# Altium PCB blueboard_h_bridges.PcbDoc
Units mm, origin at the board's own origin, x right, y up, seen from the top; angles counter-clockwise.
Board outline 35 x 18.4 mm, 2 copper layers (Top Layer, Bottom Layer); 28 components, 13 nets, 49 pads, 92 vias.
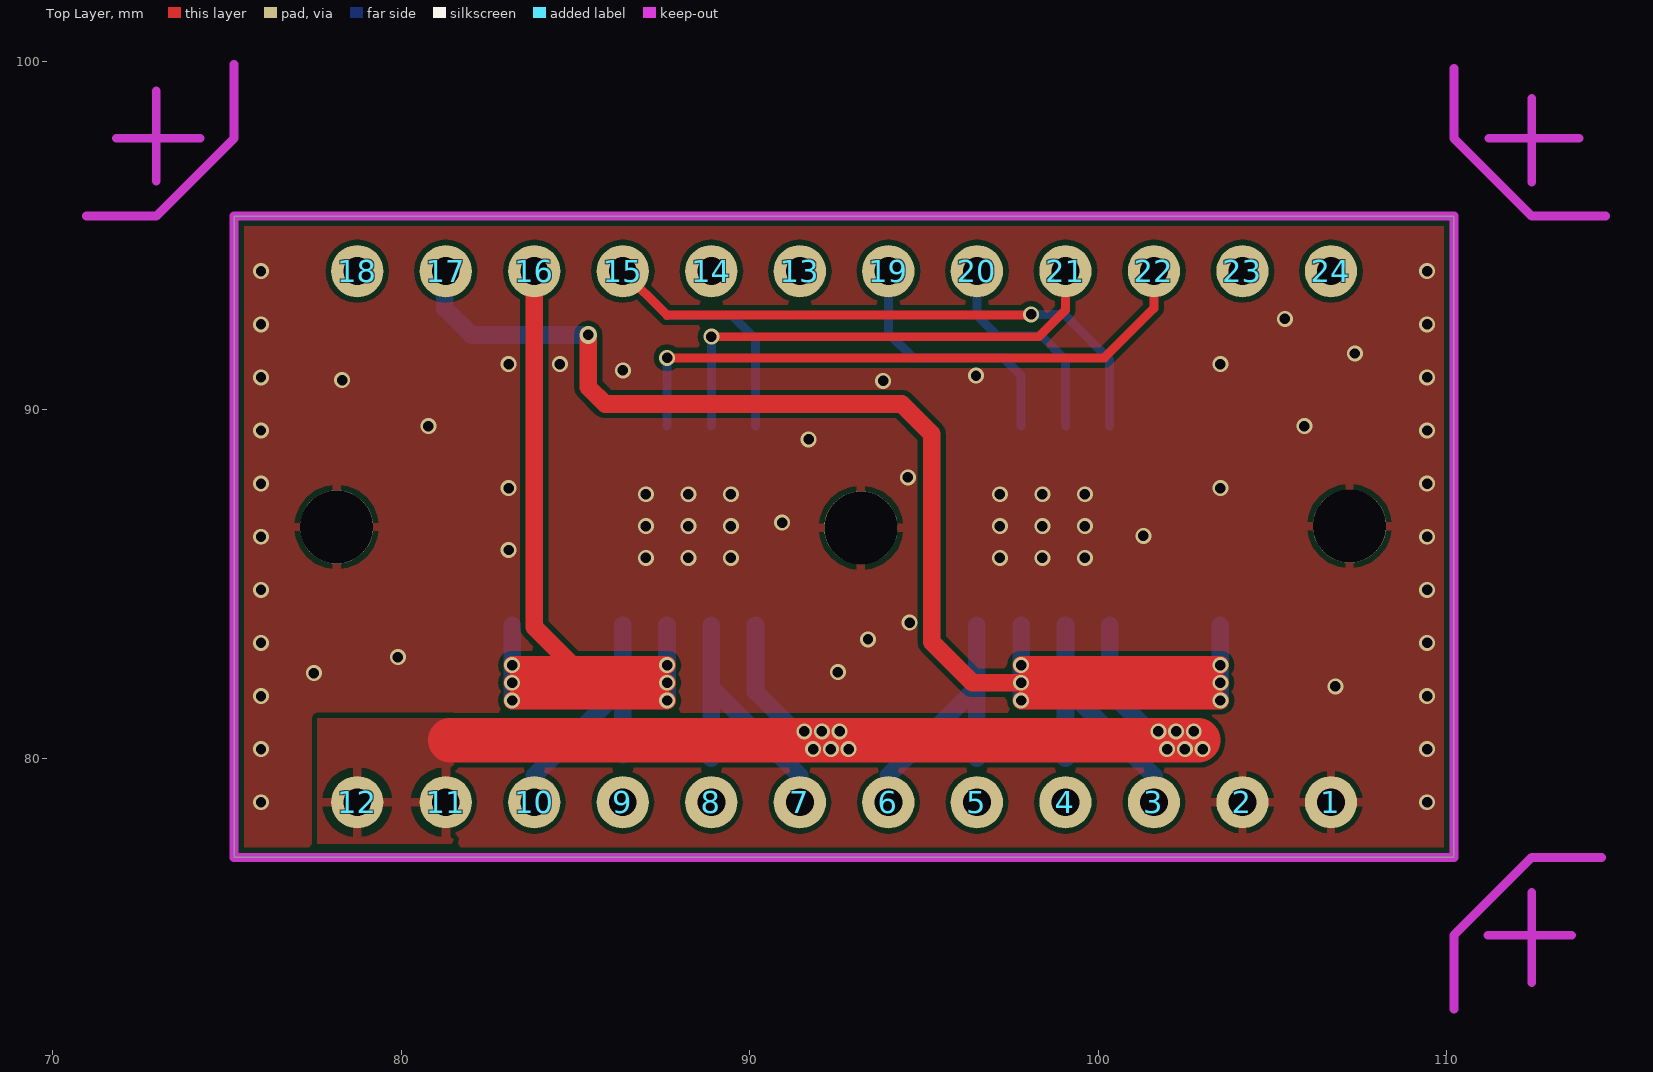
[diagram p0: Top Layer view]
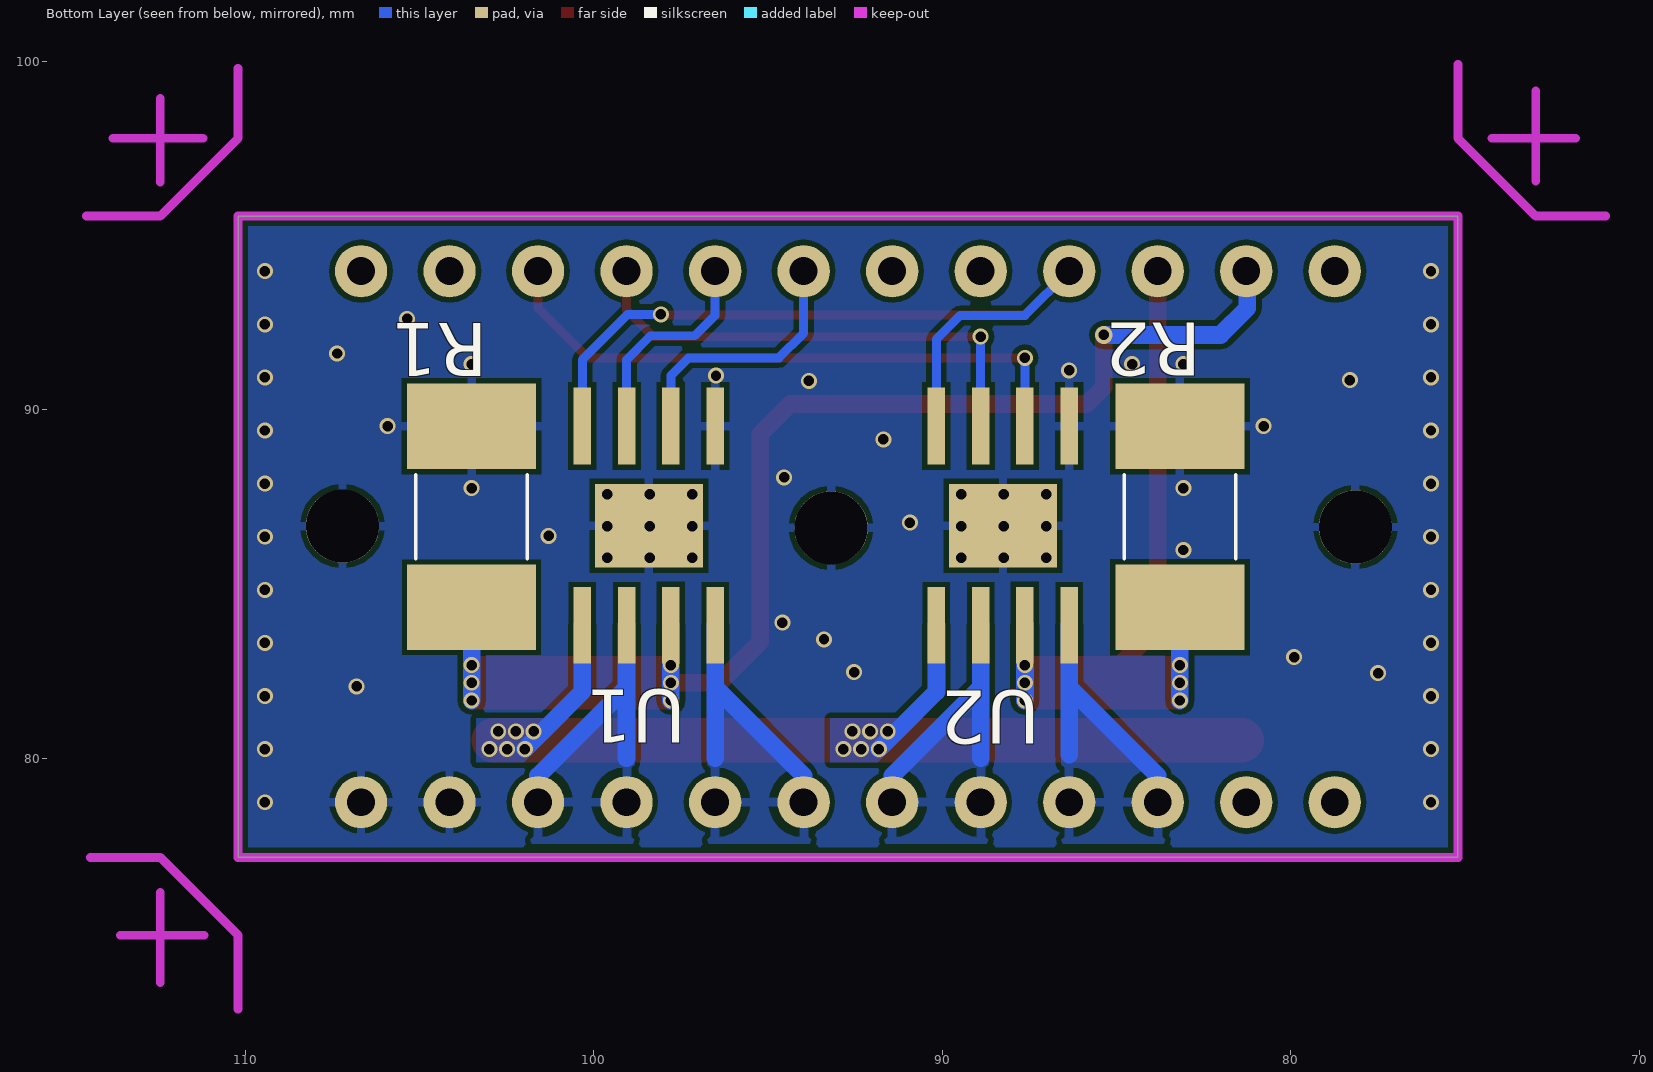
[diagram p1: Bottom Layer view, seen from below]
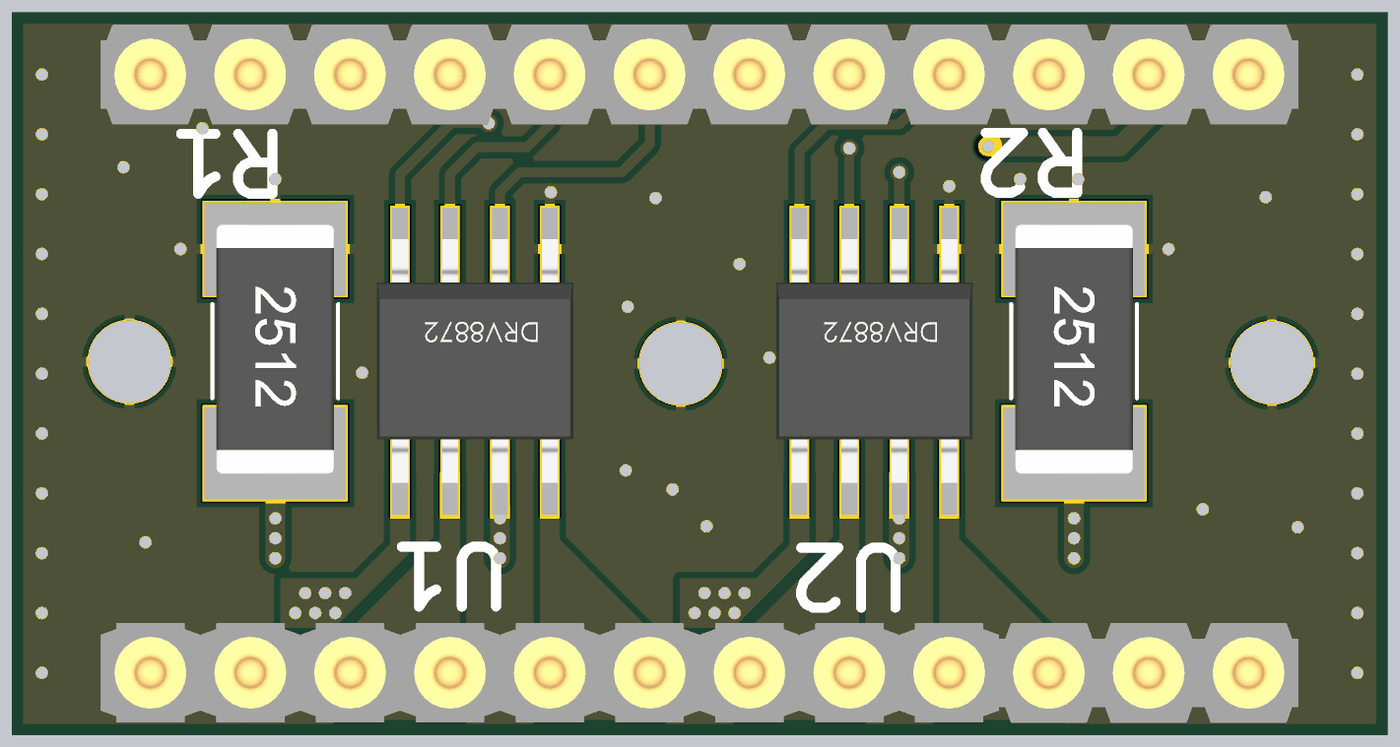
[diagram p2: 3D render of the assembled board from below, using the file's embedded part models]

## Layer stack, top to bottom
Top Layer: signal copper 0.0356
Dielectric: dielectric 0.32, FR-4, Dk 4.8
Bottom Layer: signal copper 0.0356

## Board outline
75.206,77.158 110.206,77.158 110.206,95.558 75.206,95.558

## Design rules (kind name [scope] priority, off if disabled: settings)
Clearance [All] p1: gap=0.152
PlaneConnect PlaneConnect_1 [IsVia] p1: planeconnectstyle=Direct reliefexpansion=0.508 reliefentries=4 reliefconductorwidth=0.254 reliefairgap=0.254
PlaneConnect [All] p2: planeconnectstyle=Relief reliefexpansion=0.508 reliefentries=4 reliefconductorwidth=0.254 reliefairgap=0.254
PolygonConnect PolygonConnect_1 [IsVia vs InNet('GND') Or InNet('VM')] p1: connectstyle=Direct reliefconductorwidth=0.254 reliefentries=4 polygonreliefangle="90 Angle"
PolygonConnect [All] p2: connectstyle=Relief reliefconductorwidth=0.254 reliefentries=4 polygonreliefangle="90 Angle"
RoutingVias [All] p1: holewidth=0.711 width=1.27 viastyle="Through Hole" minholewidth=0.711 minwidth=1.27 maxholewidth=0.711 maxwidth=1.27
SilkscreenOverComponentPads [All] p1: minsilkscreentomaskgap=0.254
SolderMaskExpansion [All] p1: expansion=0.102
Width [All] p1: maxlimit=1.524 minlimit=0.254 preferedwidth=0.254
26 further rules are at their usual default settings.

## Components (designator, comment, footprint, x,y, rotation, side; value= is the part's Value field where it differs from the comment)
1 "Pad" PAD#1 106.68,78.74 r90 top
2 "Pad" PAD#2 104.14,78.74 r90 top
3 "Pad" PAD#3 101.6,78.74 r90 top
4 "Pad" PAD#4 99.06,78.74 r90 top
5 "Pad" PAD#5 96.52,78.74 r90 top
6 "Pad" PAD#6 93.98,78.74 r90 top
7 "Pad" PAD#7 91.44,78.74 r90 top
8 "Pad" PAD#8 88.9,78.74 r90 top
9 "Pad" PAD#9 86.36,78.74 r90 top
10 "Pad" PAD#10 83.82,78.74 r0 top
11 "Pad" PAD#11 81.28,78.74 r0 top
12 "Pad" PAD#12 78.74,78.74 r0 top
13 "Pad" PAD#13 91.44,93.98 r0 top
14 "Pad" PAD#14 88.9,93.98 r0 top
15 "Pad" PAD#15 86.36,93.98 r0 top
16 "Pad" PAD#16 83.82,93.98 r0 top
17 "Pad" PAD#17 81.28,93.98 r0 top
18 "Pad" PAD#18 78.74,93.98 r0 top
19 "Pad" PAD#19 93.98,93.98 r0 top
20 "Pad" PAD#20 96.52,93.98 r0 top
21 "Pad" PAD#21 99.06,93.98 r0 top
22 "Pad" PAD#22 101.6,93.98 r0 top
23 "Pad" PAD#23 104.14,93.98 r0 top
24 "Pad" PAD#24 106.68,93.98 r0 top
R1 "Res2" 2512 103.505,89.535 r270 bottom
R2 "Res2" 2512 83.185,89.535 r270 bottom
U1 "DRV8872" DDA 96.52,89.535 r270 bottom
U2 "DRV8872" DDA 86.36,89.535 r270 bottom

## Footprints (in the part's own frame and the unit in brackets; to place one, negate y for a bottom-side part, rotate by r counter-clockwise, add the part's x,y. Pads: shape width x height; smd on the part's side, far side on the other; paste and mask are expansions set on the pad)
2512 [mm]
  rect 2.45x3.7 smd paste-0.05 mask+0.05: 1(0,0) 2(5.2,0)
  silkscreen extent 1.4,-1.6 3.8,1.6, body extent -0.62,-1.5 5.73,1.5, height 1.6
DDA [mm] "PowerPAD PLASTIC SMALL-OUTLINE"
  rect 2.2x0.5 smd paste-0.05 mask+0.05: 1(0,0) 2(0,-1.27) 3(0,-2.54) 4(0,-3.81) 5(5.715,-3.81) 6(5.715,-2.54) 7(5.715,-1.27) 8(5.715,0)
  rect 2.4x3.1 smd paste-0.05 mask+0.275: PPAD(2.86,-1.9)
  body extent -0.24,-4.4 5.96,0.6, height 1.53
PAD#1 [mm]
  round 1.5 hole 0.8 paste-0.05 mask+0.05: 1(0,0)
  body extent -1.27,-1.27 1.27,1.27, height 3.07
PAD#2 [mm]
  round 1.5 hole 0.8 paste-0.05 mask+0.05: 2(0,0)
  body extent -1.27,-1.27 1.27,1.27, height 3.07
PAD#3 [mm]
  round 1.5 hole 0.8 paste-0.05 mask+0.05: 3(0,0)
  body extent -1.27,-1.27 1.27,1.27, height 3.07
PAD#4 [mm]
  round 1.5 hole 0.8 paste-0.05 mask+0.05: 4(0,0)
  body extent -1.27,-1.27 1.27,1.27, height 3.07
PAD#5 [mm]
  round 1.5 hole 0.8 paste-0.05 mask+0.05: 5(0,0)
  body extent -1.27,-1.27 1.27,1.27, height 3.07
PAD#6 [mm]
  round 1.5 hole 0.8 paste-0.05 mask+0.05: 6(0,0)
  body extent -1.27,-1.27 1.27,1.27, height 3.07
PAD#7 [mm]
  round 1.5 hole 0.8 paste-0.05 mask+0.05: 7(0,0)
  body extent -1.27,-1.27 1.27,1.27, height 3.07
PAD#8 [mm]
  round 1.5 hole 0.8 paste-0.05 mask+0.05: 8(0,0)
  body extent -1.27,-1.27 1.27,1.27, height 3.07
PAD#9 [mm]
  round 1.5 hole 0.8 paste-0.05 mask+0.05: 9(0,0)
  body extent -1.27,-1.27 1.27,1.27, height 3.07
PAD#10 [mm]
  round 1.5 hole 0.8 paste-0.05 mask+0.05: 10(0,0)
  body extent -1.27,-1.27 1.27,1.27, height 3.07
PAD#11 [mm]
  round 1.5 hole 0.8 paste-0.05 mask+0.05: 11(0,0)
  body extent -1.27,-1.27 1.27,1.27, height 3.07
PAD#12 [mm]
  round 1.5 hole 0.8 paste-0.05 mask+0.05: 12(0,0)
  body extent -1.27,-1.27 1.27,1.27, height 3.07
PAD#13 [mm]
  round 1.5 hole 0.8 paste-0.05 mask+0.05: 13(0,0)
  body extent -1.27,-1.27 1.27,1.27, height 3.07
PAD#14 [mm]
  round 1.5 hole 0.8 paste-0.05 mask+0.05: 14(0,0)
  body extent -1.27,-1.27 1.27,1.27, height 3.07
PAD#15 [mm]
  round 1.5 hole 0.8 paste-0.05 mask+0.05: 15(0,0)
  body extent -1.27,-1.27 1.27,1.27, height 3.07
PAD#16 [mm]
  round 1.5 hole 0.8 paste-0.05 mask+0.05: 16(0,0)
  body extent -1.27,-1.27 1.27,1.27, height 3.07
PAD#17 [mm]
  round 1.5 hole 0.8 paste-0.05 mask+0.05: 17(0,0)
  body extent -1.27,-1.27 1.27,1.27, height 3.07
PAD#18 [mm]
  round 1.5 hole 0.8 paste-0.05 mask+0.05: 18(0,0)
  body extent -1.27,-1.27 1.27,1.27, height 3.07
PAD#19 [mm]
  round 1.5 hole 0.8 paste-0.05 mask+0.05: 19(0,0)
  body extent -1.27,-1.27 1.27,1.27, height 3.07
PAD#20 [mm]
  round 1.5 hole 0.8 paste-0.05 mask+0.05: 20(0,0)
  body extent -1.27,-1.27 1.27,1.27, height 3.07
PAD#21 [mm]
  round 1.5 hole 0.8 paste-0.05 mask+0.05: 21(0,0)
  body extent -1.27,-1.27 1.27,1.27, height 3.07
PAD#22 [mm]
  round 1.5 hole 0.8 paste-0.05 mask+0.05: 22(0,0)
  body extent -1.27,-1.27 1.27,1.27, height 3.07
PAD#23 [mm]
  round 1.5 hole 0.8 paste-0.05 mask+0.05: 23(0,0)
  body extent -1.27,-1.27 1.27,1.27, height 3.07
PAD#24 [mm]
  round 1.5 hole 0.8 paste-0.05 mask+0.05: 24(0,0)
  body extent -1.27,-1.27 1.27,1.27, height 3.07

## Part data
R1 R2: "Resistor"
U1 U2: "3.6A Brushed  DC Motor  Driver  With Fault Reporting"

## Free pads (board coordinates)
  round 2.1 hole 2.1 paste-0.05 mask+0.05: 0(78.148,86.639) 0(93.193,86.614) 0(107.213,86.665)

## Via types
v1: diameter 0.457, hole 0.3, Top Layer to Bottom Layer, tented both sides, 91 vias
v2: diameter 0.508, hole 0.305, Top Layer to Bottom Layer, 1 vias

## Nets (pads, with @x,y where several pads share a name; then routed paths per layer and width w, separated by ;. In a path a pad name is that pad's centre, name@x,y a point inside that pad or via, vN(x,y) a via of type N, cw(c..) or ccw(c..) an arc to the next point about the centre after c; other vN are vias at no path point)
AIN_1: 20.20 U1.3 | length 6.2
  Bottom Layer w0.254: 20.20 96.52,92.71 97.104,92.126 98.374,92.126 99.06,91.44 U1.3
AIN_2: 19.19 U1.2 | length 7.6
  Bottom Layer w0.254: 19.19 93.98,92.202 94.691,91.491 97.282,91.491 97.79,90.983 U1.2
  Bottom Layer w0.508: 19.19@93.955,93.955 19.19
AOUT_1: 3.3 4.4 U1.6 | length 8.2
  Bottom Layer w0.508: 99.06,80 U1.6 ; 99.06,82.042 101.6,79.502 3.3
AOUT_2: 5.5 6.6 U1.8 | length 8.2
  Bottom Layer w0.508: 6.6 93.98,79.502 96.52,82.042 ; 96.52,80 U1.8
BIN_1: 21.21 U2.3 | length 14.2
  Top Layer w0.254: v1(88.9,92.1) 98.298,92.1 99.06,92.862 21.21
  Bottom Layer w0.254: U2.3 88.9,92.024 v1@88.951,92.075
BIN_2: 22.22 U2.2 | length 17.6
  Top Layer w0.254: v1(87.63,91.491) 100.178,91.491 101.6,92.913 22.22
  Bottom Layer w0.254: U2.2 v1(87.63,91.491)
BOUT_1: 7.7 8.8 U2.6 | length 8.2
  Bottom Layer w0.508: 88.9,80 88.9,82.042 ; U2.6 88.9,82.042 ; 7.7 91.44,79.502 88.9,82.042
BOUT_2: 9.9 10.10 U2.8 | length 8.1
  Bottom Layer w0.508: 10.10 83.82,79.502 86.36,82.042 ; 86.36,80.1 U2.8
F\A\U\L\T\: 15.15 U1.4 U2.4 | length 24.1
  Top Layer w0.254: 15.15 87.63,92.71 87.642,92.722 98.056,92.722 v1(98.075,92.741)
  Bottom Layer w0.254: 15.15 87.63,92.71 89.484,92.71 90.17,92.024 U2.4 ; v1(98.075,92.741) 99.029,92.741 100.33,91.44 U1.4
GND: 1.1 2.2 pad.0 R1.1 R2.1 U1.1 U1.PPAD U2.1 U2.PPAD
  other v1: 75.978,78.74 109.442,78.74 75.978,80.264 109.442,80.264 75.978,81.788 109.442,81.788 106.807,82.067 77.495,82.448 92.532,82.474 79.908,82.906 75.978,83.312 109.442,83.312 93.396,83.414 94.59,83.896 75.978,84.836 109.442,84.836 87.02,85.75 88.24,85.75 89.459,85.75 97.18,85.75 98.4,85.75 99.619,85.75 83.083,85.979 75.978,86.36 109.442,86.36 101.295,86.385 87.02,86.665 88.24,86.665 89.459,86.665 97.18,86.665 98.4,86.665 99.619,86.665 90.932,86.766 87.02,87.579 88.24,87.579 89.459,87.579 97.18,87.579 98.4,87.579 99.619,87.579 83.083,87.757 103.505,87.757 75.978,87.884 109.442,87.884 94.539,88.062 91.694,89.154 75.978,89.408 109.442,89.408 80.781,89.535 105.918,89.535 93.828,90.83 78.308,90.856 75.978,90.932 109.442,90.932 96.495,90.983 86.36,91.135 83.083,91.313 84.557,91.313 103.505,91.313 107.366,91.618 75.978,92.456 109.442,92.456 105.359,92.608 75.978,93.98 109.442,93.98
ISENA: 17.17 R1.2 U1.7 | length 47.9
  Top Layer w0.508: v2(85.369,92.151) 85.369,90.653 85.852,90.17 94.361,90.17 95.225,89.306 95.225,83.337 96.393,82.169 v1(97.79,82.169) v1(103.505,82.169) ; v1(97.79,81.661) v1(103.505,81.661) ; v1(97.79,82.677) v1(103.505,82.677)
  Bottom Layer w0.508: 17.17 81.255,93.955 81.255,92.913 82.017,92.151 v2(85.369,92.151) ; v1(97.79,81.661) v1(97.79,82.169) v1(97.79,82.677) U1.7 ; v1(103.505,81.661) v1(103.505,82.169) v1(103.505,82.677) R1.2@103.505,83.82
ISENB: 16.16 R2.2 U2.7 | length 30
  Top Layer w0.508: v1(83.185,81.661) v1(87.63,81.661) ; v1(83.185,82.169) 84.912,82.169 ; v1(83.185,82.677) 84.912,82.677 ; 16.16 83.82,83.769 84.912,82.677 ; 84.912,82.067 84.912,82.169 ; v1(87.63,82.169) 84.912,82.169 ; v1(87.63,82.677) 84.912,82.677 ; 84.912,82.169 84.912,82.677
  Bottom Layer w0.508: v1(83.185,81.661) v1(83.185,82.169) v1(83.185,82.677) R2.2@83.185,83.82 ; v1(87.63,81.661) v1(87.63,82.169) v1(87.63,82.677) U2.7
VM: 11.11 12.12 U1.5 U2.5 | length 29.9
  Top Layer w1.27: 81.407,80.518 92.837,80.518 102.87,80.518
  Bottom Layer w0.508: U2.5 90.17,81.915 v1(91.821,80.264) ; U1.5 100.33,81.915 v1(101.981,80.264)
  other v1: 92.329,80.264 92.837,80.264 102.489,80.264 102.997,80.264 91.567,80.772 92.075,80.772 92.583,80.772 101.727,80.772 102.235,80.772 102.743,80.772
pads on no net: 13.13 14.14 18.18 23.23 24.24

## Polygon pours and split planes (outlines as drawn)
GND on Bottom Layer "BOT_GND" (solid, remove dead copper, pour order 13): 75.206,77.158 75.206,95.558 110.206,95.558 110.206,77.158
BOUT_2 on Bottom Layer "BOUT2" (solid, remove dead copper, pour order 10): 83.591,77.521 83.591,79.095 86.589,82.119 86.589,77.521
AOUT_2 on Bottom Layer "AOUT2" (solid, remove dead copper, pour order 11): 93.751,77.521 93.751,79.095 96.749,82.119 96.749,77.521
AOUT_1 on Bottom Layer "AOUT1" (solid, remove dead copper, pour order 12): 101.829,77.521 101.829,79.095 98.831,82.119 98.831,77.521
BOUT_1 on Bottom Layer "BOUT1" (solid, remove dead copper, pour order 13): 91.669,77.521 91.669,79.095 88.671,82.119 88.671,77.521
VM on Bottom Layer "VM" (solid, remove dead copper, pour order 14): 100.736,81.153 103.378,81.153 103.378,79.883 102.006,79.883
VM on Bottom Layer "VM" (solid, remove dead copper, pour order 15): 90.576,81.153 93.218,81.153 93.218,79.883 91.846,79.883
GND on Top Layer "TOP_GND" (solid, remove dead copper, pour order 11): 75.206,95.558 110.206,95.558 110.206,77.158 75.206,77.158
VM on Top Layer "VM" (solid, remove dead copper, pour order 16): 77.597,77.521 77.597,81.153 81.509,81.153 81.509,77.521

## Keep-outs
Keep-Out Layer:
  lines w0.254: 70.97,95.558 72.97,95.558 75.206,97.794 75.206,99.911 ; 71.823,97.794 73.029,97.794 74.235,97.794 ; 72.97,96.558 72.97,99.146 ; 110.206,72.806 110.206,74.923 112.442,77.158 114.442,77.158 ; 110.206,99.794 110.206,97.794 112.442,95.558 114.558,95.558 ; 111.177,74.923 112.383,74.923 113.589,74.923 ; 111.206,97.794 113.794,97.794 ; 112.442,73.57 112.442,76.158 ; 112.442,96.53 112.442,97.736 112.442,98.942 ; 75.206,77.158 75.206,95.558 110.206,95.558 110.206,77.158 75.206,77.158

## Silkscreen, mask and mechanical layers (free items; w line width, h text height)
Top Solder:
  region: 95.656,89 105.08,89 105.08,84.5 95.656,84.5
  region: 85.801,89 94.767,89 94.767,84.5 85.801,84.5

## Dimensions
110.206,95.558 to 110.206,77.158 on Drill Guide
75.206,95.558 to 110.206,95.558 on Drill Guide